# Altium PCB Power (1).PcbDoc
Units mm, origin at the board's own origin, x right, y up, seen from the top; angles counter-clockwise.
Board outline 96.65 x 82.55 mm, 4 copper layers (Top Layer, Int1 (GND), Int2 (PWR), Bottom Layer), stack 1.369 mm thick; 49 components, 73 nets, 103 pads, 11 vias.
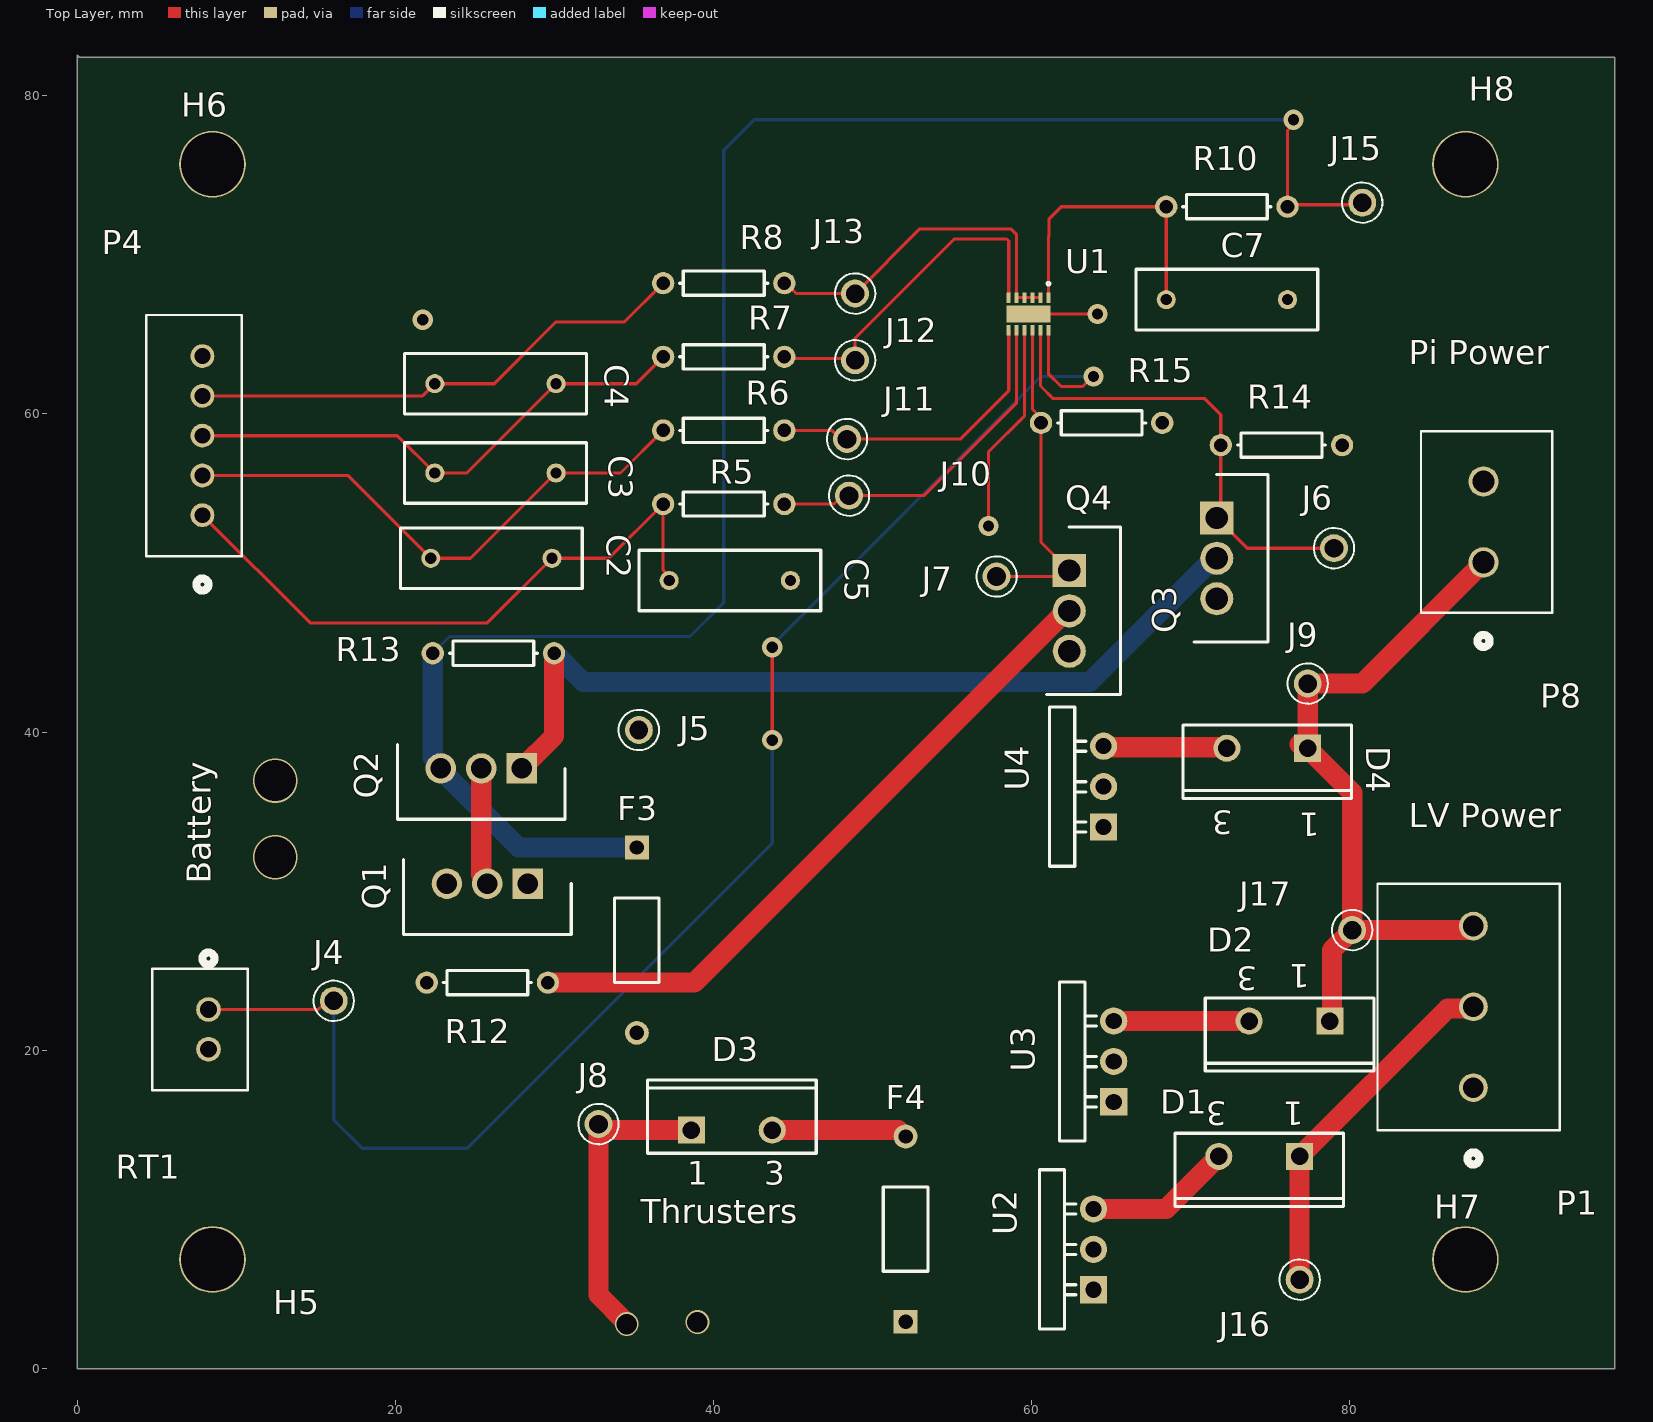
[diagram p0: Top Layer view]
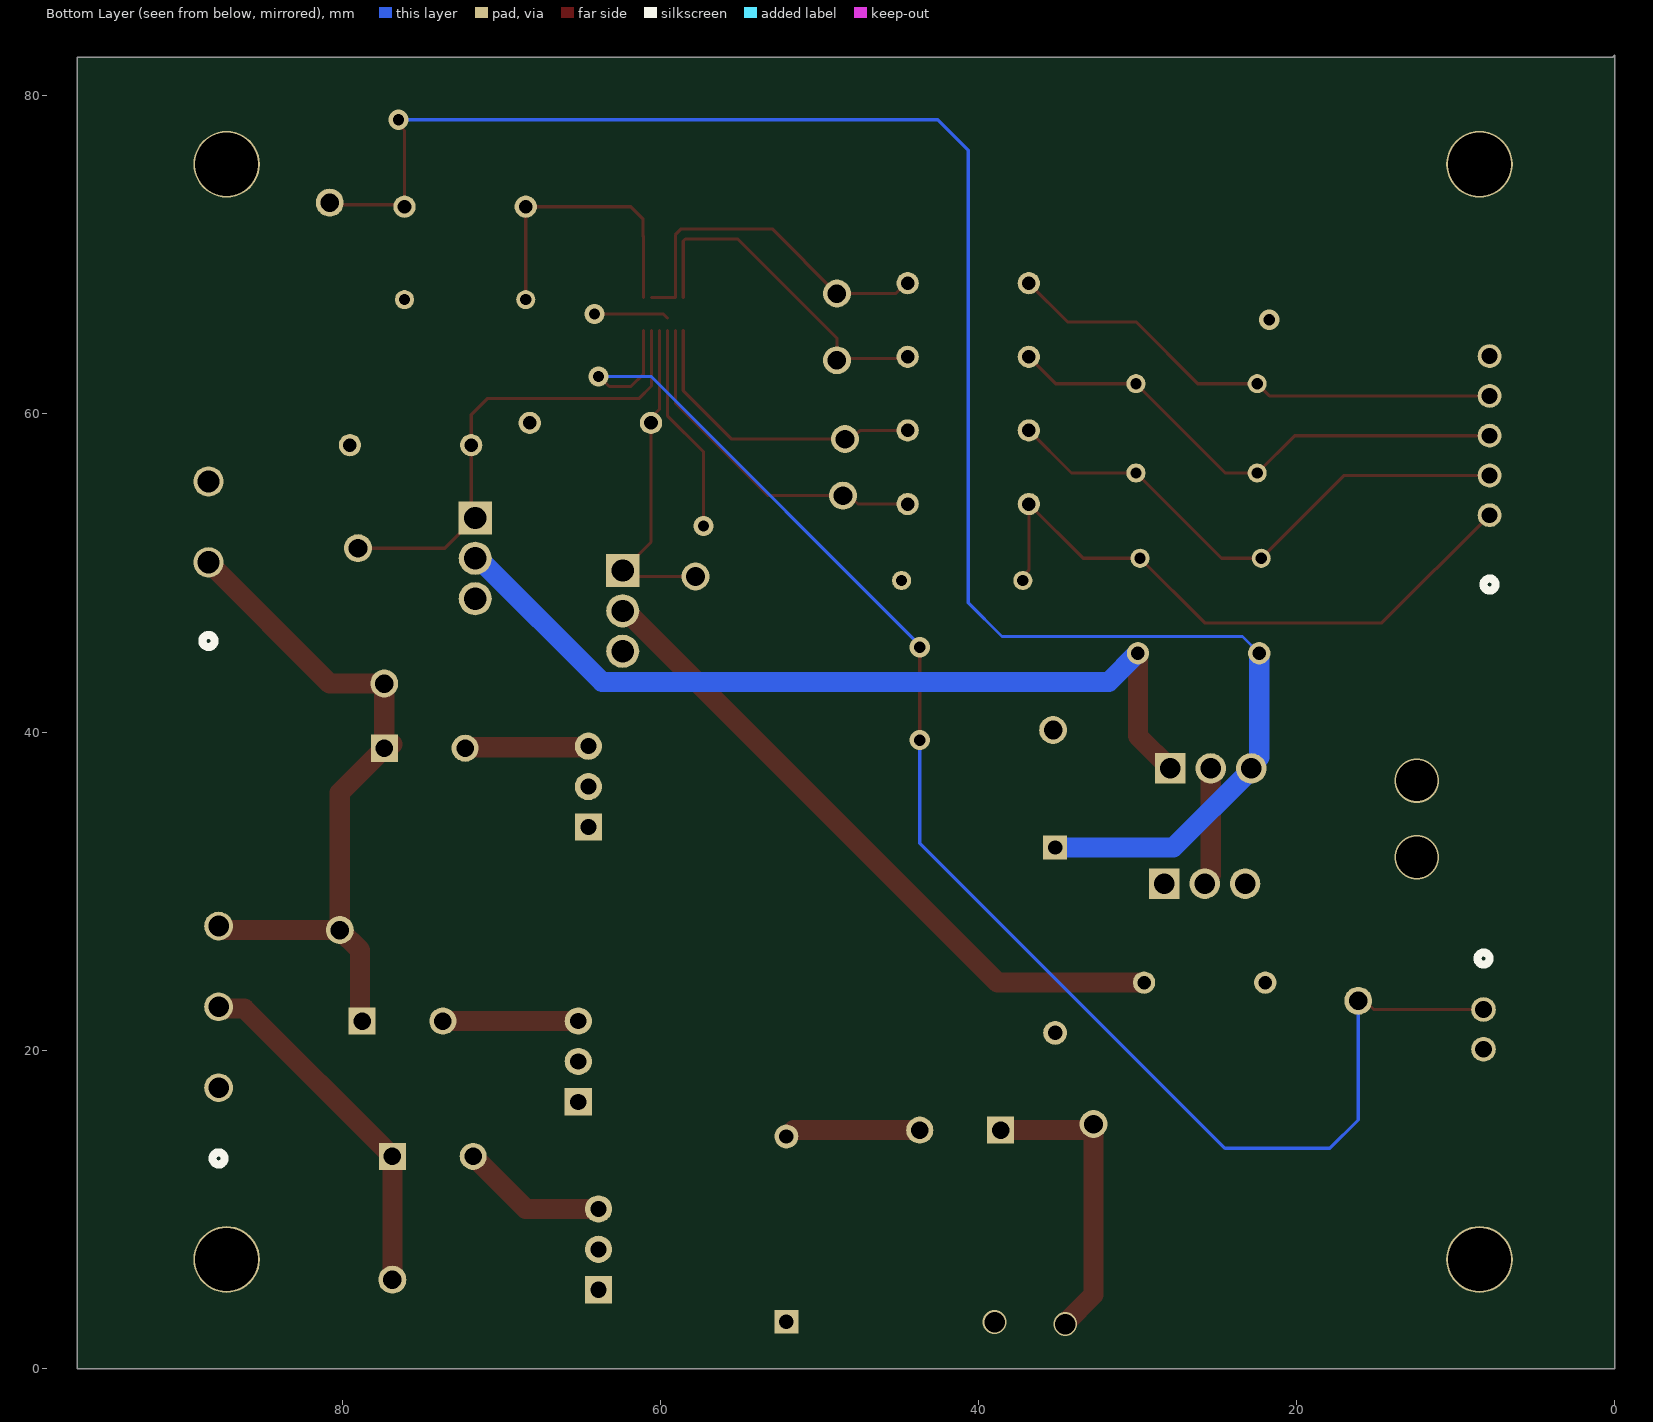
[diagram p1: Bottom Layer view, seen from below]
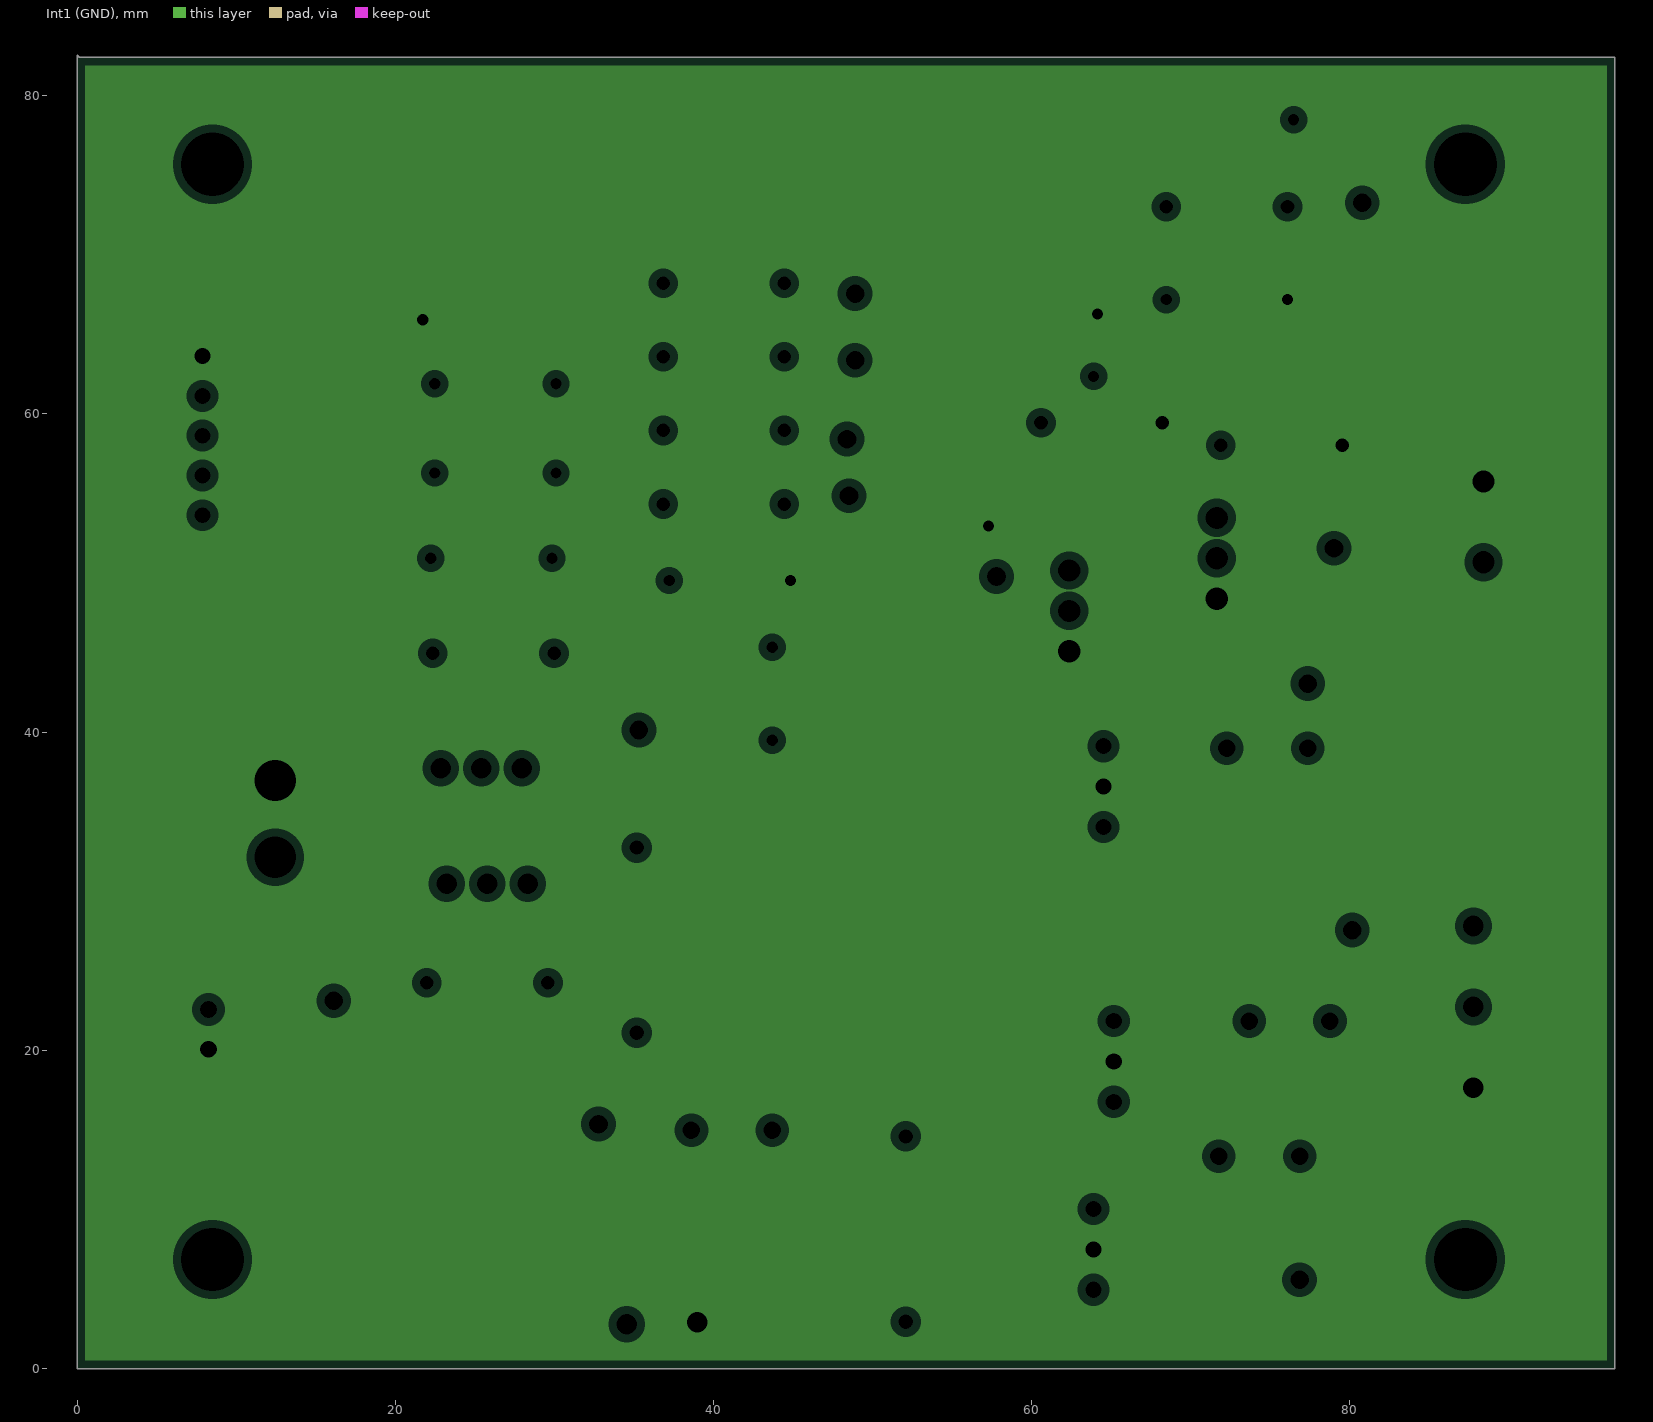
[diagram p2: Int1 (GND), clearances drawn from the general rule]
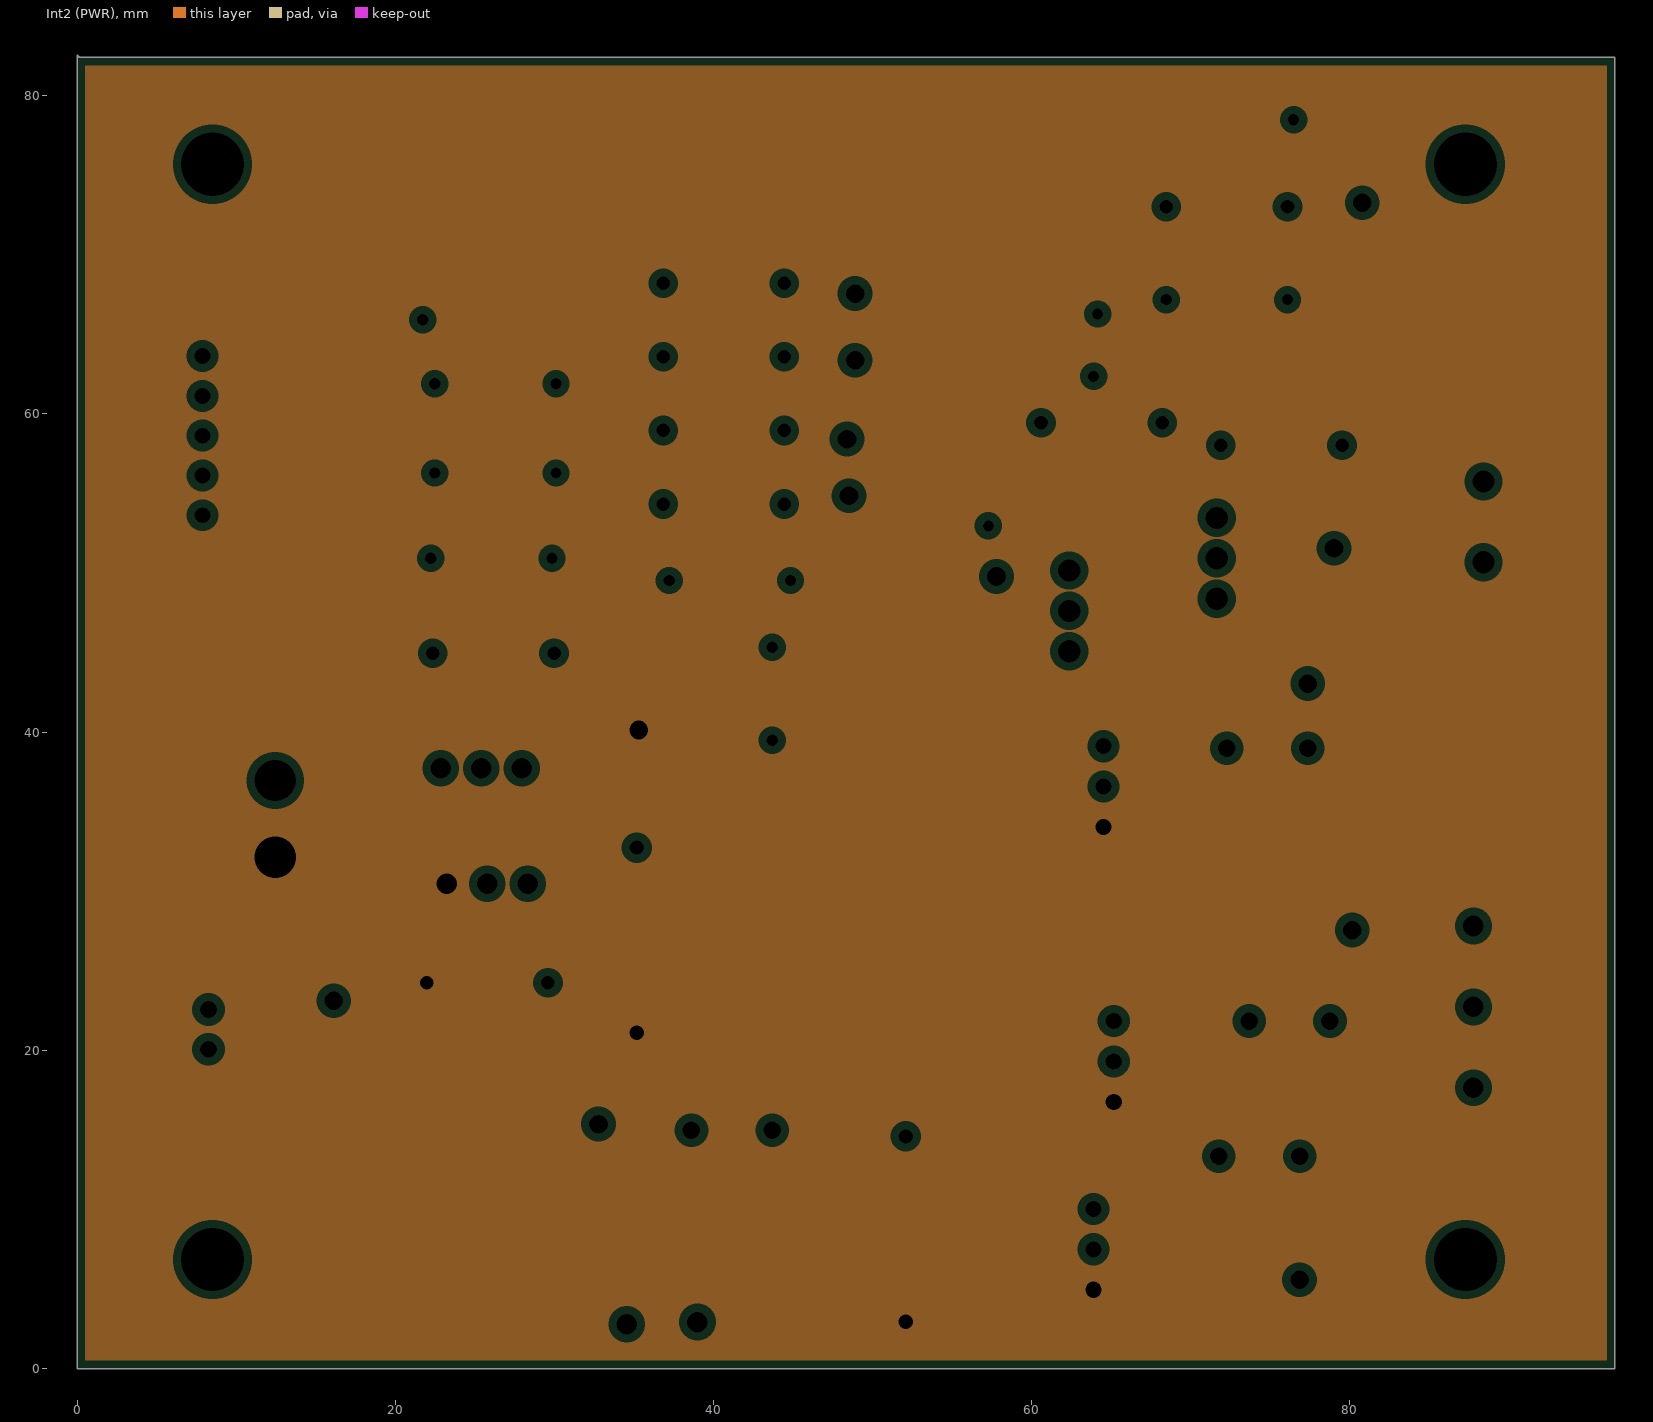
[diagram p3: Int2 (PWR), clearances drawn from the general rule]

## Layer stack, top to bottom
Top Solder: solder mask 0.0254, SM-001, Dk 4
Top Layer: signal copper 0.035
Dielectric 1: prepreg 0.1295, PP-017, Dk 4.3
Dielectric 2: prepreg 0.1295, PP-017, Dk 4.3
Int1 (GND): plane copper 0.035, net GND
Dielectric 3: core 0.7112, Core-039, Dk 4.8
Int2 (PWR): plane copper 0.035, net 24V
Dielectric 4: prepreg 0.1295, PP-017, Dk 4.3
Dielectric 5: prepreg 0.1295, PP-017, Dk 4.3
Bottom Layer: signal copper 0.035
Bottom Solder: solder mask 0.0254, SM-001, Dk 4

## Board outline
0,82.55 0,0 96.647,0 96.647,82.423 0.127,82.423

## Design rules (kind name [scope] priority, off if disabled: settings)
Clearance [All] p1: gap=0.254 ignorepadtopadclearanceinfootprint=FALSE except(0: Arc-Hole Track-Hole SMDPad-Hole THPad-Hole Via-Hole Fill-Hole Poly-Hole Region-Hole Text-Hole)
PlaneClearance [All] p1: clearance=0.508
PlaneConnect [All] p1: planeconnectstyle=Relief reliefexpansion=0.508 reliefentries=4 reliefconductorwidth=0.254 reliefairgap=0.254
PolygonConnect [All] p1: connectstyle=Relief reliefconductorwidth=0.254 reliefentries=4 polygonreliefangle="90 Angle" airgapwidth=0.254
RoutingVias [All] p1: holewidth=0.711 width=1.27 viastyle="Through Hole" minholewidth=0.711 minwidth=1.27 maxholewidth=0.711 maxwidth=1.27
SolderMaskExpansion [All] p1: expansion=0.102 istentingtop=FALSE
Width [All] p1: maxlimit=3 minlimit=0.2 preferedwidth=1.274 toplayer_prefwidth=1.27 minimp=50.000000 maximp=50.000000 favimp=50.000000
28 further rules are at their usual default settings.

## Classes and differential pairs
component class IMU_board_rev1: B1 J1
component class Thruster: D3 F4 J8
component class "Battery_Management and Thrusters": C2 C3 C4 C7 D1 D2 D4 F3 J4 J5 J6 J7 J9 J10 J11 J12 J13 J15 J16 J17 P1 P8 PB1 PB2 Q1 Q2 Q3 Q4 R5 R6 R7 R8 R10 R12 R13 R14 R15 U1 U2 U3 U4

## Components (designator, comment, footprint, x,y, rotation, side; value= is the part's Value field where it differs from the comment)
C2 "Cap" RAD-0.3 26.035,50.927 r0 top value=.1uF
C3 "Cap" RAD-0.3 26.289,56.286 r0 top value=.1uF
C4 "Cap" RAD-0.3 26.289,61.9 r0 top value=.1uF
C5 "Cap" RAD-0.3 41.021,49.53 r0 top value=.1uF
C7 "Cap" RAD-0.3 72.263,67.183 r180 top value=.1uF
D1 "Protection Diode" TO-220AC 74.295,13.335 r180 top
D2 "Protection Diode" TO-220AC 76.2,21.844 r180 top
D3 "Protection Diode" TO-220AC 41.148,14.986 r0 top
D4 "Protection Diode" TO-220AC 74.803,38.989 r180 top
F3 "Fuse 1" PIN-W2/E2.8 35.179,26.924 r270 top
F4 "Fuse 1" PIN-W2/E2.8 52.07,8.763 r90 top
H5 "Hole 3.96mm" "Hole 3mm"#1 7.112,6.858 r0 top
H6 "Hole 3.96mm" "Hole 3mm"#2 8.509,75.692 r0 top
H7 "Hole 3.96mm" "Hole 3mm"#3 87.249,6.477 r0 top
H8 "Hole 3.96mm" "Hole 3mm"#4 89.408,76.708 r0 top
J4 "5002" KEYSTONE_5002 16.129,23.114 r270 top
J5 "5002" KEYSTONE_5002 35.306,40.132 r270 top
J6 "5002" KEYSTONE_5002 78.994,51.562 r0 top
J7 "5002" KEYSTONE_5002 57.785,49.784 r0 top
J8 "5002" KEYSTONE_5002 32.766,15.367 r0 top
J9 "5002" KEYSTONE_5002 77.343,43.053 r0 top
J10 "5002" KEYSTONE_5002 48.514,54.864 r0 top
J11 "5002" KEYSTONE_5002 48.387,58.42 r0 top
J12 "5002" KEYSTONE_5002 48.895,63.373 r0 top
J13 "5002" KEYSTONE_5002 48.895,67.564 r0 top
J15 "5002" KEYSTONE_5002 80.772,73.279 r0 top
J16 "5002" KEYSTONE_5002 76.835,5.588 r0 top
J17 "5002" KEYSTONE_5002 80.137,27.559 r0 top
P1 "1711738" 1711738_PXC 87.757,17.653 r90 top
P4 "B5B-XH-A (LF)(SN)" "CONN_B5B-XH-A (LF)(SN)_JST" 7.874,53.634 r90 top
P8 "1760510000" CONN2_1760510000_WED 88.392,50.673 r90 top
Q1 "IRF5210PBF" TO254P469X1042X1967-3P 28.321,30.48 r180 top
Q2 "IRF5210PBF" TO254P469X1042X1967-3P 27.94,37.719 r180 top
Q3 "IRLZ44PBF" TO254P465X1024X2050-3P 71.628,53.467 r270 top
Q4 "IRLZ44PBF" TO254P465X1024X2050-3P 62.357,50.165 r270 top
R5 "" AXIAL-0.3 40.64,54.338 r180 top value=1K
R6 "Res1" AXIAL-0.3 40.64,58.964 r180 top value=1K
R7 "" AXIAL-0.3 40.64,63.591 r180 top value=1K
R8 "Res1" AXIAL-0.3 40.64,68.217 r180 top value=1K
R10 "Res1" AXIAL-0.3 72.263,73.025 r0 top value=300
R12 "Res1" AXIAL-0.3 25.781,24.257 r180 top value=1K
R13 "Res1" AXIAL-0.3 26.162,44.958 r180 top value=1K
R14 "Res1" AXIAL-0.3 75.692,58.039 r180 top value=1K
R15 "Res1" AXIAL-0.3 64.389,59.436 r180 top value=1K
RT1 "B2B-XH-A(LF)(SN)" CONN_B2B-XH-A(LF)(SN)_JST 8.255,22.566 r90 top
U1 "BQ7720700DSSR" WSON12_DSS_TEX 59.797,66.281 r270 top
U2 "TPSM84203EAB" EAB0003A 63.881,7.493 r90 top
U3 "TPSM84205EAB" EAB0003A 65.151,19.304 r90 top
U4 "TPSM84205EAB" EAB0003A 64.516,36.576 r90 top

## Footprints (in the part's own frame and the unit in brackets; to place one, negate y for a bottom-side part, rotate by r counter-clockwise, add the part's x,y. Pads: shape width x height; smd on the part's side, far side on the other; paste and mask are expansions set on the pad)
1711738_PXC [mil]
  round 71 hole 51 mask+0: 1(0,0) 2(200,0) 3(400,0)
  silkscreen extent -190,-214 505,237, body extent 0,0 10,10, height 10
AXIAL-0.3 [mm] "Axial Device, Thru-Hole; 2 Leads; 0.3 in Pin Spacing"
  round 1.4 hole 0.85: 1(-3.81,0) 2(3.81,0)
  silkscreen extent -2.77,-0.76 2.77,0.76
CONN2_1760510000_WED [mil]
  round 75 hole 55 mask+0: 1(0,0) 2(200,0)
  silkscreen extent -209,-170 324,155, body extent 0,0 10,10, height 10
CONN_B2B-XH-A(LF)(SN)_JST [mil]
  round 61 hole 41 mask+0: 1(0,0) 2(-98.43,0)
  silkscreen extent -200,-97 141,139, body extent 0,0 10,10, height 10
"CONN_B5B-XH-A (LF)(SN)_JST" [mil]
  round 59 hole 39 mask+0: 1(0,0) 2(98.43,0) 3(196.86,0) 4(295.29,0) 5(393.72,0)
  silkscreen extent -187,-97 495,139, body extent 0,0 10,10, height 10
EAB0003A [mm]
  rect 1.71x1.71 hole 1.01 mask+0.051: 1(-2.54,0)
  round 1.71 hole 1.01 mask+0.051: 2(0,0) 3(2.54,0)
  silkscreen extent -5,1.1 5,3.4, body extent 0,0 0.25,0.25, height 0.25
"Hole 3mm"#1 [mil]
  round 165 hole 156: 1(55,0)
"Hole 3mm"#2 [mil]
  round 165 hole 155.98: 1(0,0)
"Hole 3mm"#3 [mil]
  round 165 hole 156: 1(0,15)
"Hole 3mm"#4 [mil]
  round 165 hole 156: 1(-85,-40)
KEYSTONE_5002 [mm]
  round 1.755 hole 1.17: 1(0,0)
  silkscreen extent -1.27,-1.27 1.27,1.27
PIN-W2/E2.8 [mm] "Thru-Hole; 2 Leads"
  rect 1.5x1.5 hole 0.9: 1(-5.825,0)
  round 1.5 hole 0.9: 2(5.825,0)
  silkscreen extent -2.65,-1.4 2.65,1.4
RAD-0.3 [mm] "Radial Cap, Thru-Hole; 2 Leads; 0.3 in Pin Spacing"
  round 1.2 hole 0.7: 1(-3.81,0) 2(3.81,0)
  silkscreen extent -5.71,-1.91 5.71,1.91
TO254P465X1024X2050-3P [mm]
  rect 2.085x2.085 / inner round 2.085 / far side rect 2.085x2.085 hole 1.39: 1(0,0)
  round 2.085 hole 1.39: 2(2.54,0) 3(5.08,0)
  silkscreen extent -2.72,-1.43 7.8,3.22
TO254P469X1042X1967-3P [mm]
  rect 1.92x1.92 / inner round 1.92 / far side rect 1.92x1.92 hole 1.28: 1(0,0)
  round 1.92 hole 1.28: 2(2.54,0) 3(5.08,0)
  silkscreen extent -2.73,-1.5 7.81,3.19
TO-220AC [mm] "TO, Thru-Hole, Vertical, Heatsink Mounted; 3 In-Line Leads (1 Absent); Pitch 2.54 mm"
  rect 1.7x1.7 hole 1.1: 1(-2.54,0)
  round 1.7 hole 1.1: 3(2.54,0)
  silkscreen extent -5.3,-1.45 5.3,3.15
WSON12_DSS_TEX [mil]
  rect 26x10 smd paste+0 mask+0: 1(-40.5,49.22) 2(-40.5,29.54) 3(-40.5,9.85) 4(-40.5,-9.84) 5(-40.5,-29.53) 6(-40.5,-49.22) 7(40.5,-49.22) 8(40.5,-29.53) 9(40.5,-9.84) 10(40.5,9.85) 11(40.5,29.54) 12(40.5,49.22)
  rect 43x108 smd paste+0 mask+0: 13(0,0)
  silkscreen extent -79,45 -71,53, body extent -41,-61 41,61, height 32

## Part data
C2 C3 C4 C5 C7: "Capacitor", LatestRevisionDate=17-Jul-2002, LatestRevisionNote="Re-released for DXP Platform.", PackageDescription="Radial Cap, Thru-Hole; 2 Leads; 0.3 in Pin Spacing", PackageReference=RAD-0.3, Published=8-Jun-2000, Publisher="Altium Limited"
D1 D2 D3 D4: library part "Diode 10TQ035", "Schottky Rectifier", ComponentLink1Description="Manufacturer Link", ComponentLink1URL=http://www.irf.com/, ComponentLink2Description=Datasheet, ComponentLink2URL=http://www.irf.com/product-info/datasheets/data/10tq.pdf, DatasheetVersion=PD-2.057B, LatestRevisionDate=17-Jul-2002, LatestRevisionNote="Re-released for DXP Platform.", Note="Terminal 2 is the TAB and is electrically connected to the cathode", PackageDescription="TO, Thru-Hole, Vertical, Heatsink Mounted; 3 In-Line Leads (1 Absent); Pitch 2.54 mm", PackageReference=TO-220AC, PackageVersion=Feb-1998, Published=8-Jun-2000, Publisher="Altium Limited"
F3 F4: "Fuse", LatestRevisionDate=17-Jul-2002, LatestRevisionNote="Re-released for DXP Platform.", PackageDescription="Thru-Hole; 2 Leads", PackageReference=PIN-W2/E2.8, Published=8-Jun-2000, Publisher="Altium Limited"
H5 H6 H7 H8: library part "Hole 3mm"
J4 J5 J6 J7 J8 J9 J10 J11 J12 J13 J15 J16 J17: "2.2ÂµH Shielded Wirewound Inductor 1.8A 66mOhm Max Nonstandard", Package="Test Point Keystone Electronics", Availability=Unavailable, MF="Keystone Electronics", Mouser-Purchase-URL=https://snapeda.com/shop?store=Mouser&id=500797, MP=5002, Price=None, SnapEDA_Link=https://www.snapeda.com/parts/5002/Keystone%20Electronics/view-part/500797/?ref=snap
P1: "No Description Available", Mfr_Name="Phoenix Contact", Copyright="Copyright (C) 2022 Ultra Librarian. All rights reserved.", Digi-Key_Part_Number_1=277-1028-ND, Manufacturer_Part_Number=1711738, RefDes=RefDes, Type=DEV
P4: "No Description Available", Mfr_Name=JST, Copyright="Copyright (C) 2022 Ultra Librarian. All rights reserved.", Digi-Key_Part_Number_1=455-2270-ND, Manufacturer_Part_Number="B5B-XH-A (LF)(SN)", RefDes=RefDes, Type=DEV
P8: "No Description Available", Mfr_Name=Weidmuller, Copyright="Copyright (C) 2022 Ultra Librarian. All rights reserved.", Digi-Key_Part_Number_1=281-1882-ND, Manufacturer_Part_Number=1760510000, RefDes=RefDes, Type=DEV
Q1 Q2: "MOSFET P-Channel 100V 40A TO220AB Infineon IRF5210PBF P-channel MOSFET Transistor, 40 A, 100 V, 3-Pin TO-220AB", Manufacturer_Name=Infineon, Mouser Part Number=942-IRF5210PBF, Datasheet Link=https://datasheet.datasheetarchive.com/originals/distributors/Datasheets_SAMA/282f86ced5e538d8a52fd01096578d56.pdf, Geometry.Height=4.69mm, Manufacturer_Part_Number=IRF5210PBF, Mouser Price/Stock=https://www.mouser.co.uk/ProductDetail/Infineon-Technologies/IRF5210PBF?qs=9%252BKlkBgLFf3S3YiL4ijtLg%3D%3D
Q3 Q4: "Trans MOSFET N-CH 60V 50A", Manufacturer_Name=Vishay, Mouser Part Number=844-IRLZ44PBF, Datasheet Link=https://datasheet.datasheetarchive.com/originals/distributors/Datasheets-DGA24/1593196.pdf, Geometry.Height=4.65mm, Manufacturer_Part_Number=IRLZ44PBF, Mouser Price/Stock=https://www.mouser.co.uk/ProductDetail/Vishay-Semiconductors/IRLZ44PBF?qs=cvaI6Thkwxs%2F%2FLKnrdRUbA%3D%3D
R5 R7: library part Res1, "Resistor", LatestRevisionDate=17-Jul-2002, LatestRevisionNote="Re-released for DXP Platform.", PackageDescription="Axial Device, Thru-Hole; 2 Leads; 0.3 in Pin Spacing", PackageReference=AXIAL-0.3, Published=8-Jun-2000, Publisher="Altium Limited"
R6 R8 R10 R12 R13 R14 R15: "Resistor", LatestRevisionDate=17-Jul-2002, LatestRevisionNote="Re-released for DXP Platform.", PackageDescription="Axial Device, Thru-Hole; 2 Leads; 0.3 in Pin Spacing", PackageReference=AXIAL-0.3, Published=8-Jun-2000, Publisher="Altium Limited"
RT1: "fOR RT", Mfr_Name=JST, Copyright="Copyright (C) 2022 Ultra Librarian. All rights reserved.", Digi-Key_Part_Number_1=455-2247-ND, Manufacturer_Part_Number=B2B-XH-A(LF)(SN), RefDes=RefDes, Type=DEV
U1 U2: "No Description Available", Mfr_Name="Texas Instruments", Copyright="Copyright (C) 2022 Ultra Librarian. All rights reserved.", RefDes=RefDes, Type=DEV
  U1: Manufacturer_Part_Number=BQ7720700DSSR
  U2: Manufacturer_Part_Number=TPSM84203EAB
U3 U4: library part TPSM84205EAB_1, "No Description Available", Mfr_Name="Texas Instruments", Copyright="Copyright (C) 2022 Ultra Librarian. All rights reserved.", Manufacturer_Part_Number=TPSM84205EAB, RefDes=RefDes, Type=DEV

## Via types
v1: diameter 1.27, hole 0.711, Top Layer to Bottom Layer, 7 vias
v2: diameter 1.5, hole 1.29, Top Layer to Bottom Layer, 2 vias
v3: diameter 2.8, hole 2.59, Top Layer to Bottom Layer, 2 vias

## Nets (pads, with @x,y where several pads share a name; then routed paths per layer and width w, separated by ;. In a path a pad name is that pad's centre, name@x,y a point inside that pad or via, vN(x,y) a via of type N, cw(c..) or ccw(c..) an arc to the next point about the centre after c; other vN are vias at no path point)
"3.3 V": 
3.3V: D1.1 J16.1 P1.2 | length 22.6
  Top Layer w1.27: J16.1 D1.1 86.131,22.631 87.655,22.631 P1.2
"5 V": 
24V: F3.2 F4.1 J5.1 Q1.3 R12.2 U2.1 U3.1 U4.1
  other v3: 12.446,32.131
+5: D2.1 D4.1 J9.1 J17.1 P1.3 P8.1 | length 45.3
  Top Layer w1.27: D4.1@76.835,39.243 D4.1@77.214,39.371 ; D2.1 78.867,21.844 78.867,26.289 J17.1 ; P1.3 87.613,27.813 87.359,27.559 J17.1 ; P8.1 80.772,43.053 J9.1 D4.1 80.137,36.195 J17.1
GND: C5.2 C7.1 P1.1 P4.5 P8.2 Q3.3 Q4.3 R14.1 R15.1 RT1.2 U1.9 U1.13 U2.2 U3.2 U4.2 | length 17.9
  Top Layer w0.2: v1(57.277,52.959) 57.277,57.625 59.547,59.895 U1.9 ; U1.13@59.547,66.031 U1.13 v1(64.135,66.281)
  other v1: 21.717,65.913
  other v2: 38.989,2.921
  other v3: 12.446,36.957
NetB1_1: 
NetB1_4: 
NetB1_5: 
NetB1_6: 
NetB1_7: 
NetC2_1: C2.1 C3.2 P4.2 R6.2 | length 34.4
  Top Layer w0.2: P4.2 17.018,56.134 C2.1 24.722,50.927 30.081,56.286 C3.2 34.152,56.286 R6.2
NetC2_2: C2.2 C5.1 P4.1 R5.2 | length 39.8
  Top Layer w0.2: P4.1 14.645,46.863 25.781,46.863 C2.2 33.419,50.927 R5.2 36.83,50.182 37.211,49.801 C5.1
NetC3_1: C3.1 C4.2 P4.3 R7.2 | length 33
  Top Layer w0.2: P4.3 20.131,58.634 C3.1 24.486,56.286 C4.2 35.139,61.9 R7.2
NetC4_1: C4.1 P4.4 R8.2 | length 32
  Top Layer w0.2: P4.4 21.713,61.134 C4.1 26.213,61.9 30.099,65.786 34.399,65.786 R8.2 R8.2@36.824,68.217
  Bottom Layer w0.2: C4.1@22.434,61.854 C4.1
NetC7_2: C7.2 R10.1 U1.1 | length 18.5
  Top Layer w0.2: U1.1 61.048,71.159 61.087,71.199 61.087,72.263 61.849,73.025 R10.1 C7.2
NetD1_3: D1.3 U2.3 | length 9.2
  Top Layer w1.27: U2.3 68.453,10.033 D1.3
NetD2_3: D2.3 U3.3 | length 8.5
  Top Layer w1.27: U3.3 D2.3
NetD3_1: D3.1 J8.1 | length 19.1
  Top Layer w1.27: J8.1@32.766,15.143 32.766,4.634 34.544,2.856 v2(34.544,2.794) ; J8.1 32.897,15.367 33.278,14.986 D3.1
NetD3_3: D3.3 F4.2 | length 8.5
  Top Layer w1.27: D3.3 51.61,14.986 52.008,14.588 F4.2
NetD4_3: D4.3 U4.3 | length 7.8
  Top Layer w1.27: U4.3 64.579,39.052 72.2,39.052 D4.3
NetF1_1: 
NetF2_1: 
NetF3_1: F3.1 J15.1 Q2.3 R10.2 R13.2 | length 116.9
  Top Layer w0.2: v1(76.454,78.486) 76.454,78.196 76.073,77.815 R10.2 76.2,73.152 80.645,73.152 J15.1
  Bottom Layer w0.2: R13.2 23.406,46.012 38.519,46.012 40.64,48.133 40.64,76.581 42.545,78.486 v1(76.454,78.486)
  Bottom Layer w1.274: R13.2 22.352,38.402 22.86,37.894 Q2.3 22.86,37.641 27.752,32.749 F3.1
NetJ1_15: 
NetJ1_25: 
NetJ1_26: 
NetJ1_27: 
NetJ1_31: 
NetJ1_32: 
NetJ1_33: 
NetJ1_34: 
NetJ1_35: 
NetJ1_36: 
NetJ1_37: 
NetJ1_38: 
NetJ1_41: 
NetJ1_42: 
NetJ1_43: 
NetJ1_44: 
NetJ1_45: 
NetJ1_46: 
NetJ1_47: 
NetJ1_48: 
NetJ1_51: 
NetJ1_52: 
NetJ1_53: 
NetJ1_54: 
NetJ1_55: 
NetJ1_56: 
NetJ1_57: 
NetJ1_58: 
NetJ1_61: 
NetJ1_62: 
NetJ1_63: 
NetJ1_64: 
NetJ4_1: J4.1 RT1.1 U1.12 | length 97.9
  Top Layer w0.2: RT1.1 15.16,22.566 15.708,23.114 J4.1 ; v1(43.688,45.339) v1(43.688,39.497) 43.688,39.37 v1@43.815,39.243 ; U1.12 61.048,62.523 61.849,61.722 63.194,61.722 63.829,62.357 v1(63.881,62.357)
  Bottom Layer w0.2: J4.1 16.129,15.621 17.907,13.843 24.511,13.843 43.688,33.02 v1(43.688,39.497) ; v1(43.688,45.339) 43.688,45.466 60.579,62.357 v1(63.881,62.357)
NetJ6_1: J6.1 Q3.1 R14.2 U1.11 | length 30.3
  Top Layer w0.2: U1.11 60.548,61.753 61.341,60.96 70.866,60.96 71.882,59.944 R14.2 71.882,53.721 Q3.1 73.533,51.562 J6.1
NetJ7_1: J7.1 Q4.1 R15.2 U1.10 | length 20.8
  Top Layer w0.2: J7.1 61.976,49.784 Q4.1 60.579,51.943 R15.2 60.579,59.761 60.047,60.292 U1.10
NetJ10_1: J10.1 R5.1 U1.8 | length 21.8
  Top Layer w0.2: R5.1 47.567,54.338 48.093,54.864 J10.1 53.213,54.864 59.047,60.698 U1.8
NetJ11_1: J11.1 R6.1 U1.7 | length 19.4
  Top Layer w0.2: R6.1 47.422,58.964 47.966,58.42 J11.1 55.499,58.42 58.547,61.468 U1.7
NetJ12_1: J12.1 R7.1 U1.6 | length 21.8
  Top Layer w0.2: R7.1 44.559,63.482 48.786,63.482 J12.1 48.895,64.77 55.118,70.993 58.42,70.993 58.547,70.866 U1.6
NetJ13_1: J13.1 R8.1 U1.2 U1.3 U1.4 U1.5 | length 22.2
  Top Layer w0.2: R8.1 44.558,68.217 45.211,67.564 J13.1 52.959,71.628 58.674,71.628 59.047,71.255 U1.5 U1.4 U1.3 U1.2
NetP6_1: 
NetP6_11: 
NetP7_1: 
NetP7_2: 
NetP7_3: 
NetP7_5: 
NetQ1_2: Q1.2 Q2.2 | length 7.4
  Top Layer w1.27: Q2.2 25.4,31.037 25.781,30.656 Q1.2
NetQ2_1: Q2.1 Q3.2 R13.1 | length 53.7
  Top Layer w1.27: Q2.1 29.972,39.751 R13.1
  Bottom Layer w1.274: R13.1 30.006,44.958 31.813,43.151 63.658,43.151 71.434,50.927 Q3.2
NetQ4_2: Q4.2 R12.1 | length 42.4
  Top Layer w1.27: R12.1 38.797,24.257 62.165,47.625 Q4.2
NetR1_1: 
pads on no net: H5.1 H6.1 H7.1 H8.1 Q1.1

## Polygon pours and split planes (outlines as drawn)
GND on Int1 (GND) (split plane): 96.137,0.51 0.51,0.51 0.51,81.913 96.137,81.913
24V on Int2 (PWR) (split plane): 96.137,0.51 0.51,0.51 0.51,81.913 96.137,81.913

## Silkscreen, mask and mechanical layers (free items; w line width, h text height)
Top Overlay:
  text "Pi Power" at 83.693,63.119 h1.52
  text "LV Power" at 83.693,34.036 h1.52
  text "Battery" at 8.382,30.48 h1.52 r90
  text "Thrusters" at 35.433,9.144 h1.52
Mechanical 1:
  lines w0.254: 62.099,0 62.803,0 ; 0,0 96.52,0 96.52,82.423 0,82.423 0,0

## Text inside footprints (layer, text, board x,y; h text height)
D1: Top Overlay "1" at 77.085,16.76 h1.5 r180; Top Overlay "3" at 72.255,16.76 h1.5 r180
D2: Top Overlay "1" at 77.47,25.4 h1.5 r180; Top Overlay "3" at 74.16,25.269 h1.5 r180
D3: Top Overlay "3" at 43.188,11.561 h1.5; Top Overlay "1" at 38.358,11.561 h1.5
D4: Top Overlay "3" at 72.644,35.052 h1.5 r180; Top Overlay "1" at 78.105,34.925 h1.5 r180